# Altium PCB PCB_nano_3_2021-10-25.pcbdoc
Units mil, origin at the board's own origin, x right, y up, seen from the top; angles counter-clockwise.
Board outline 2271.13 x 2536.03 mil, 3 copper layers (Top Layer, Mid-Layer 1, Bottom Layer); 88 components, 110 nets, 418 pads, 132 vias.
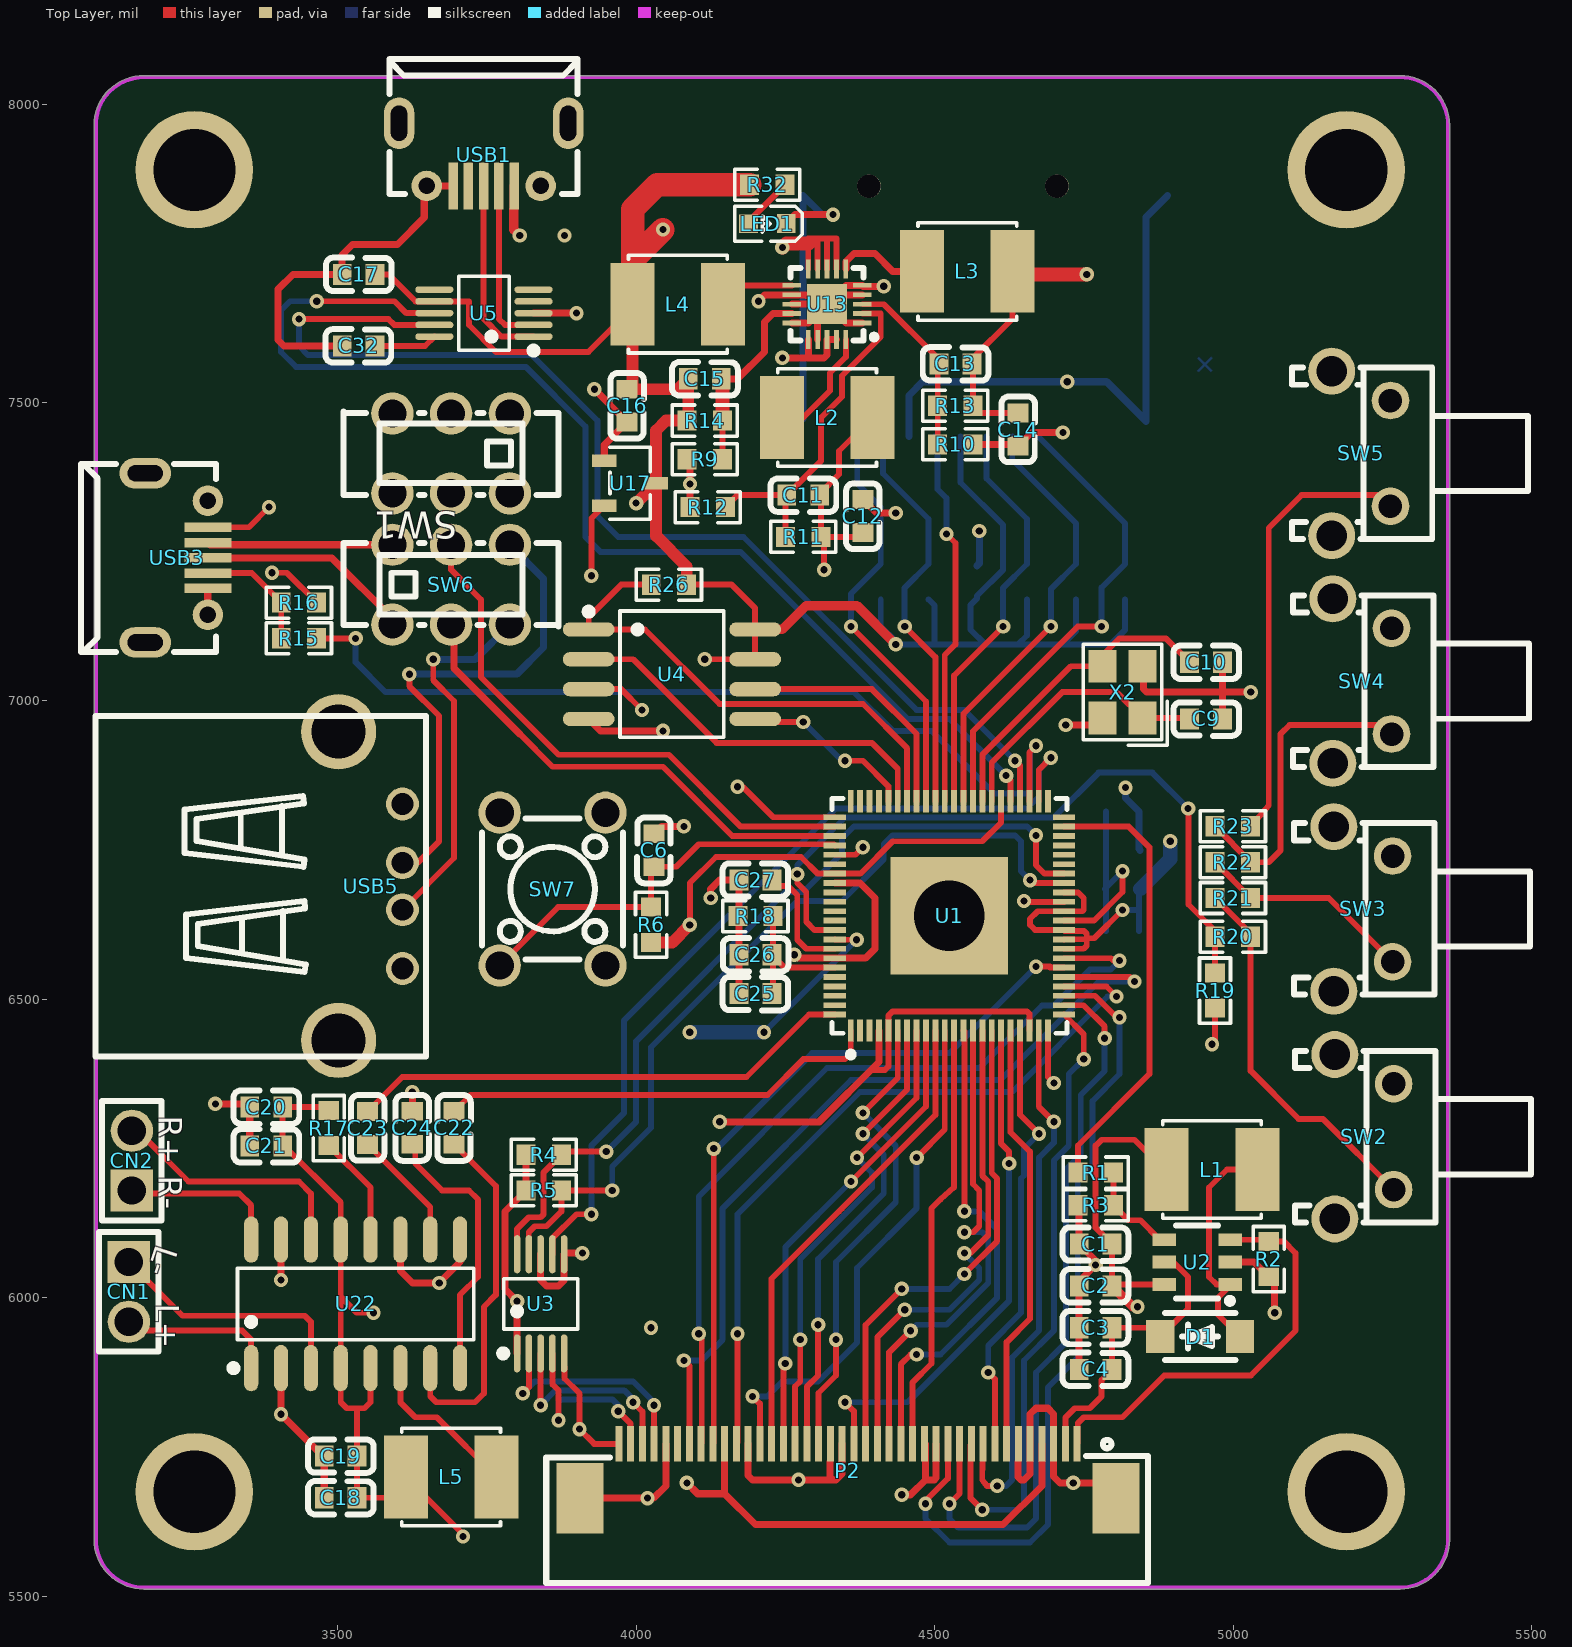
[diagram p0: Top Layer view]
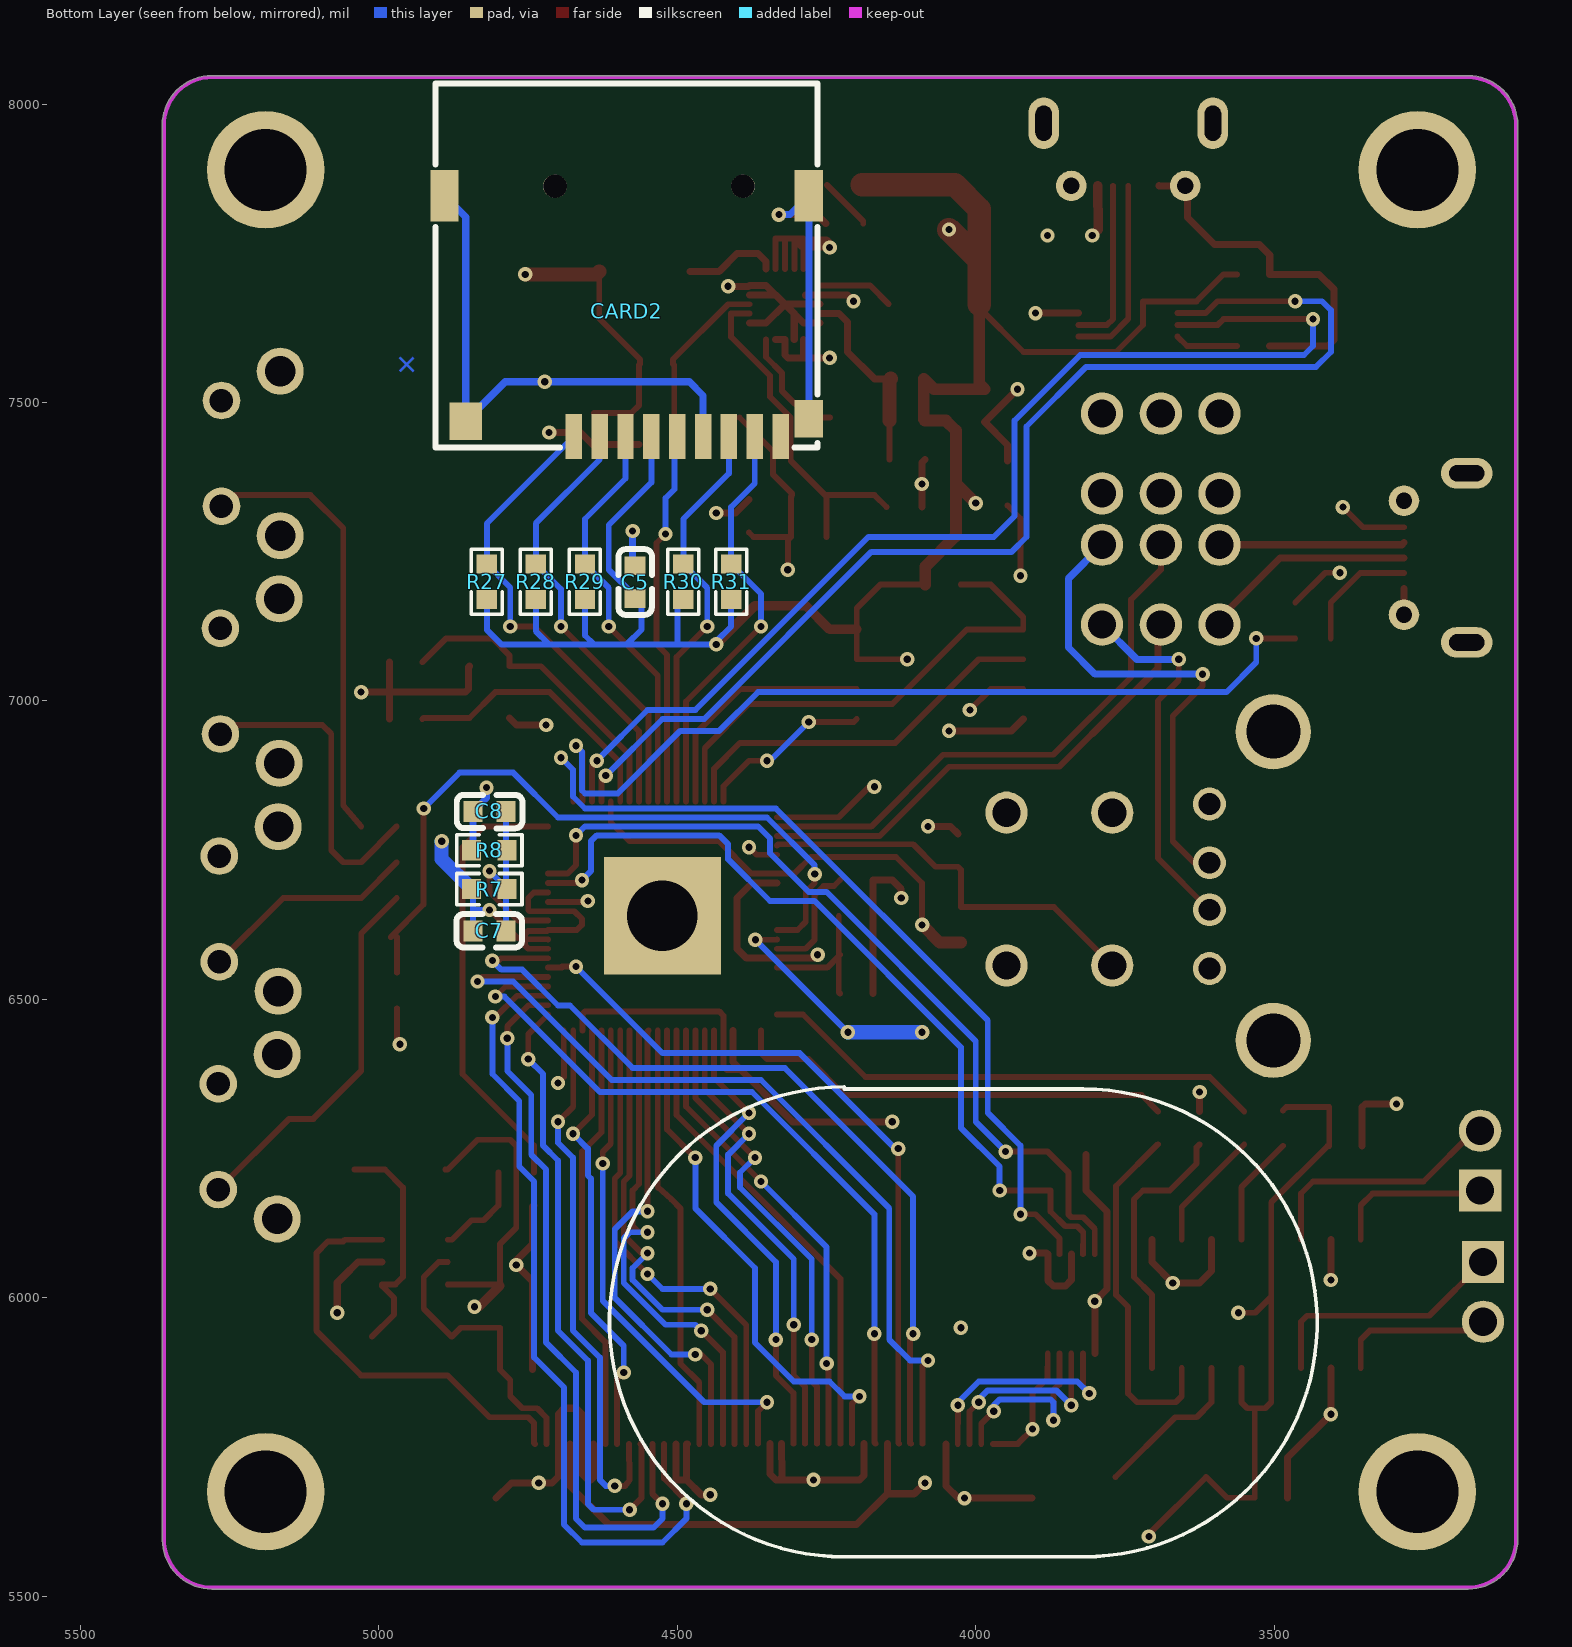
[diagram p1: Bottom Layer view, seen from below]
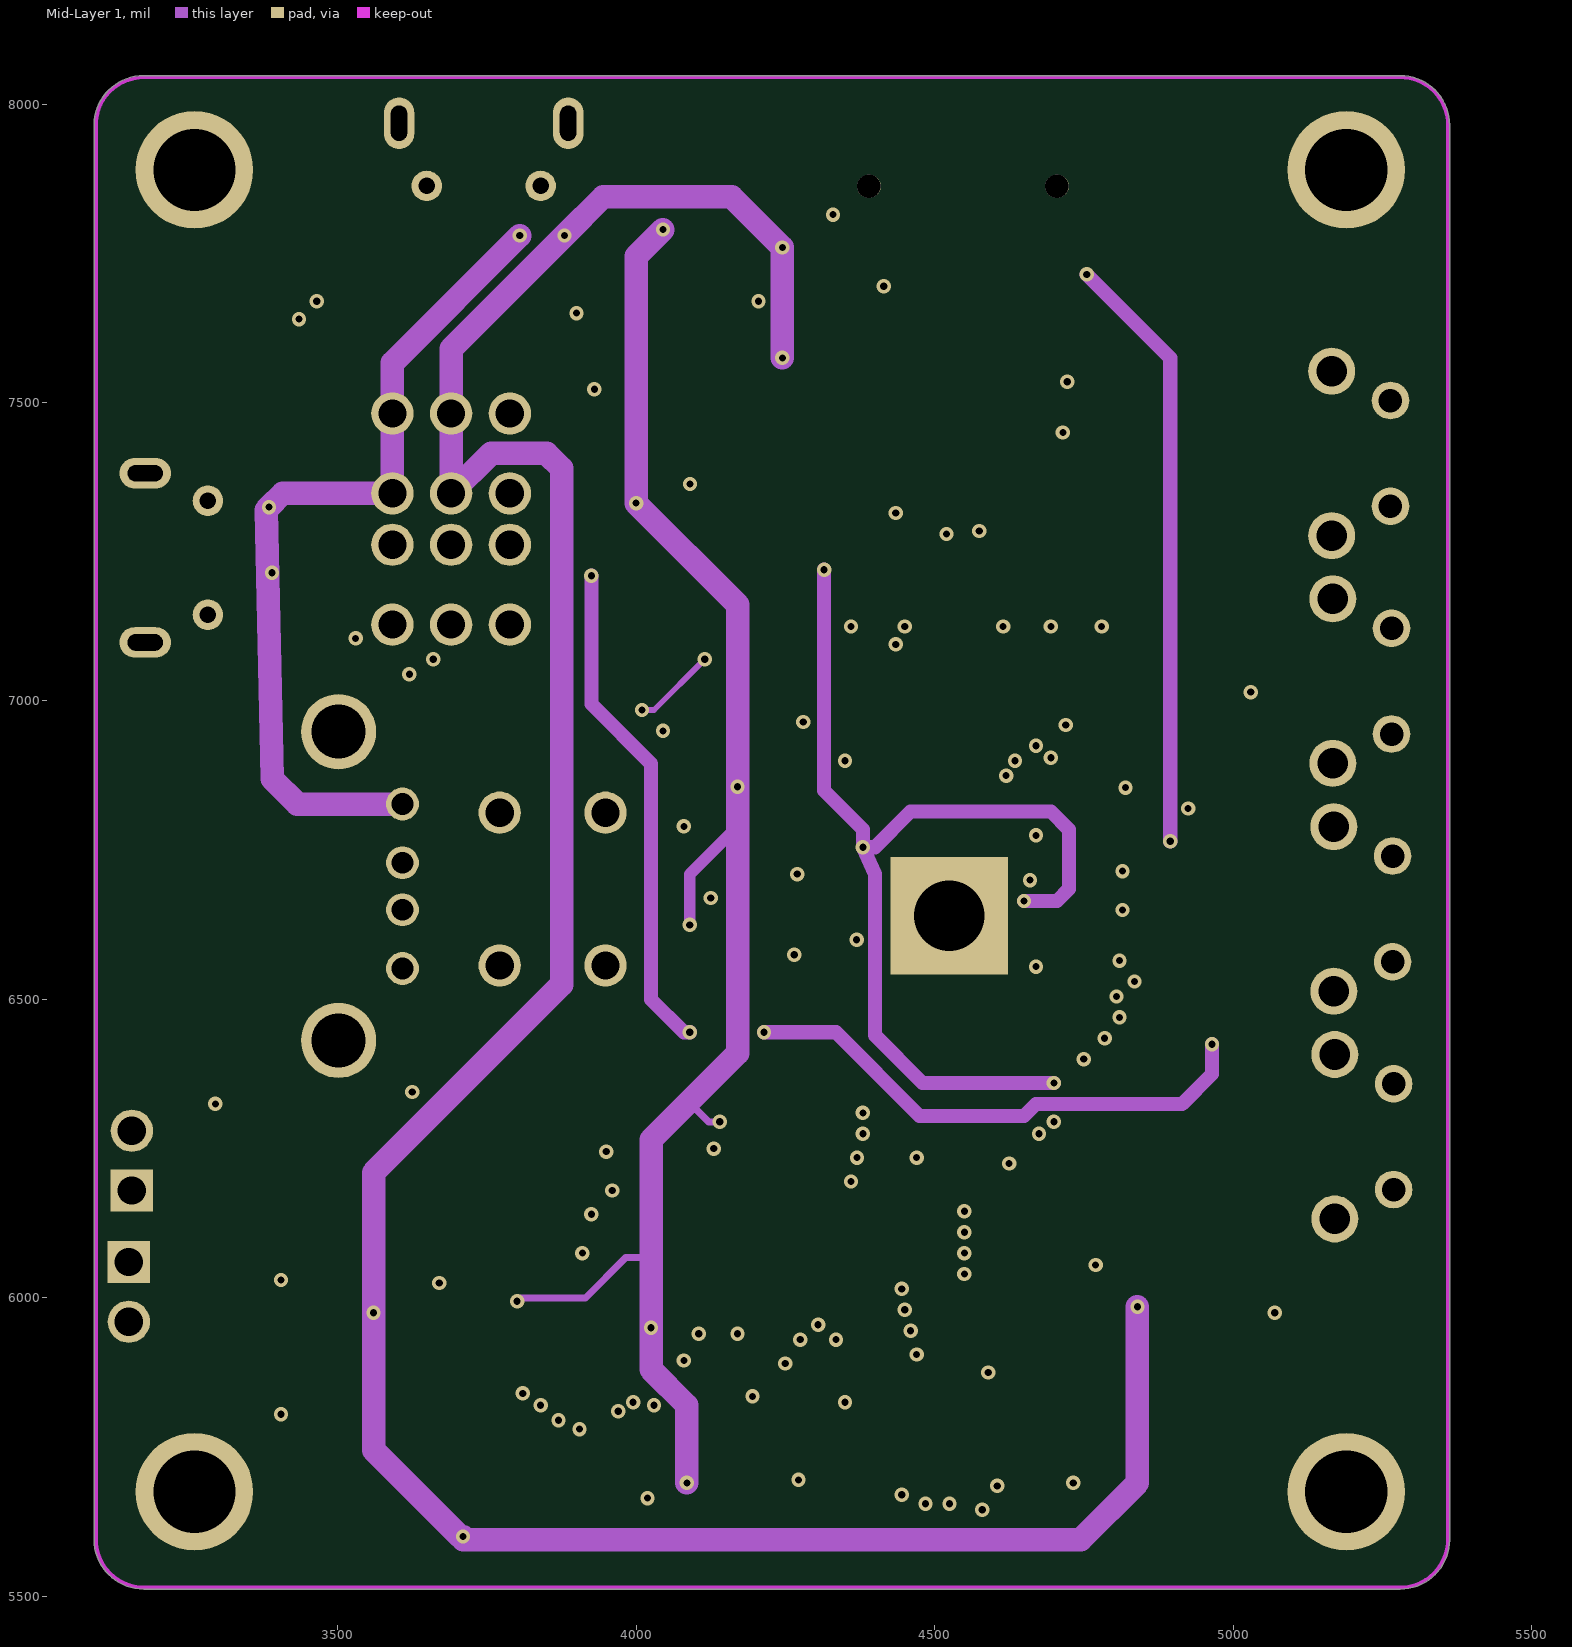
[diagram p2: Mid-Layer 1]

## Layer stack, top to bottom
Top Solder: solder mask 0.4, Solder Resist, Dk 3.5
Top Layer: signal copper 1.4
Dielectric1: dielectric 12.6, FR-4, Dk 4.8
Mid-Layer 1: signal copper 1.4
Dielectric2: dielectric 12.6, FR-4, Dk 4.8
Bottom Layer: signal copper 1.4
Bottom Solder: solder mask 0.4, Solder Resist, Dk 3.5

## Board outline
3174.62,5511.84 cw(c3174.84,5594.84) 3091.84,5594.62 cw(c3094.84,5594.84) 3091.83,5594.84 3091.83,7964.84 cw(c3094.84,7964.84) 3091.84,7965.07 cw(c3174.84,7964.84) 3174.62,8047.85 cw(c3174.84,8044.84) 3174.84,8047.86 5279.95,8047.86 cw(c5279.95,8044.84) 5280.17,8047.85 cw(c5279.95,7964.84) 5362.95,7964.84 cw(c5279.95,7964.84) 5362.95,7964.18 cw(c5359.94,7964.21) 5362.86,7963.46 5362.86,5594.84 cw(c5359.84,5594.84) 5362.85,5594.62 cw(c5279.84,5594.84) 5280.07,5511.84 cw(c5279.84,5514.84) 5279.84,5511.83 3174.84,5511.83 cw(c3174.84,5514.84)

## Design rules (kind name [scope] priority, off if disabled: settings)
Clearance [All] p1: gap=10
PolygonConnect [All] p1: connectstyle=Relief reliefconductorwidth=10 reliefentries=4 polygonreliefangle="90 Angle" airgapwidth=10
RoutingVias [All] p1: holewidth=28 width=50 viastyle="Through Hole" minholewidth=28 minwidth=50 maxholewidth=28 maxwidth=50
SolderMaskExpansion [All] p1: expansion=4
Width [All] p1: maxlimit=10 minlimit=10 preferedwidth=10
30 further rules are at their usual default settings.

## Components (designator, comment, footprint, x,y, rotation, side; value= is the part's Value field where it differs from the comment)
C1 "10uF" C0603#1 4769.84,6089.84 r0 top
C2 "1nF" C0603#1 4769.84,6019.84 r0 top
C3 "1uF" C0603#1 4769.84,5949.84 r0 top
C4 "10nF" C0603#1 4769.84,5879.84 r0 top
C5 "100nF" C0603#2 4570.72,7199.04 r90 bottom
C6 "1uF" C0603#1 4029.84,6749.84 r90 top
C7 "0.1uF" C0603#2 4814.84,6614.84 r0 bottom
C8 "0.1uF" C0603#2 4814.84,6814.84 r180 bottom
C9 "20pF" C0603#1 4954.84,6969.84 r180 top
C10 "20pF" C0603#1 4954.84,7064.84 r180 top
C11 "220pF" C0603#1 4279.84,7344.84 r180 top
C12 "10uF" C0603#1 4379.84,7309.84 r90 top
C13 "220pF" C0603#1 4534.84,7564.84 r180 top
C14 "10uF" C0603#1 4639.84,7454.84 r270 top
C15 "220pF" C0603#1 4114.84,7539.84 r180 top
C16 "10uF" C0603#1 3984.84,7494.84 r90 top
C17 "0.1uF" C0603#1 3534.84,7714.84 r180 top
C18 "10uF" C0603#1 3504.84,5664.84 r180 top
C19 "1uF" C0603#1 3504.84,5734.84 r180 top
C20 "10uF" C0603#1 3380.04,6319.43 r180 top
C21 "1uF" C0603#1 3380.04,6254.43 r180 top
C22 "470nF" C0603#1 3694.84,6284.84 r90 top
C23 "470nF" C0603#1 3550.04,6284.43 r270 top
C24 "10uF" C0603#1 3624.84,6284.84 r90 top
C25 "100nF" C0603#1 4199.84,6509.63 r0 top
C26 "10uF" C0603#1 4199.84,6574.84 r180 top
C27 "100nF" C0603#1 4199.84,6699.84 r0 top
C32 "0.1uF" C0603#1 3534.84,7594.84 r0 top
CARD2 "MR01A-01211" TF-SMD_MR01A-01211 4584.84,7644.84 r180 bottom
CN1 "RE-H022TD-1190 (LF)(SN)" HDR-TH_2P-P2.54-V-M-1 3149.84,6009.84 r270 top
CN2 "RE-H022TD-1190 (LF)(SN)" HDR-TH_2P-P2.54-V-M-1 3154.84,6229.84 r90 top
D1 "1N4007W" SOD-123_L2.8-W1.8-LS3.7-RD 4944.84,5934.84 r0 top
L1 "2.2uH" IND-SMD_L4.0-W4.0_SMNR4020 4964.84,6214.84 r180 top
L2 "2.2uH" IND-SMD_L4.0-W4.0_SMNR4020 4319.84,7474.84 r0 top
L3 "2.2uH" IND-SMD_L4.0-W4.0_SMNR4020 4554.84,7719.84 r0 top
L4 "2.2uH" IND-SMD_L4.0-W4.0_SMNR4020 4069.84,7664.84 r0 top
L5 "2.2uH" IND-SMD_L4.0-W4.0_SMNR4020 3689.84,5699.84 r180 top
LED1 "19-21/G6W-BL2N1L/3T" LED0603-RD_GREEN 4219.84,7799.8 r180 top
P2 "FPC 0.5MM 40P Pull type H2.0mm Pick up" CONN-SMD_AFC07-S40ECC-00 4354.84,5709.84 r180 top
R1 "0" R0603#1 4769.84,6209.84 r0 top
R2 "5.2R" R0603#1 5059.84,6064.84 r90 top
R3 "1k" R0603#1 4769.84,6154.84 r0 top
R4 "1k" R0603#1 3844.84,6239.84 r180 top
R5 "1k" R0603#1 3844.84,6179.84 r180 top
R6 "1k" R0603#1 4024.84,6624.84 r90 top
R7 "1k" R0603#2 4814.84,6684.84 r0 bottom
R8 "1k" R0603#2 4814.84,6749.84 r180 bottom
R9 "150K 1%" R0603#1 4114.84,7404.84 r0 top
R10 "150K 1%" R0603#1 4534.84,7429.84 r180 top
R11 "100K 1%" R0603#1 4279.84,7274.84 r0 top
R12 "100K 1%" R0603#1 4119.84,7324.84 r180 top
R13 "470K 1%" R0603#1 4534.84,7494.84 r180 top
R14 "680K 1%" R0603#1 4114.84,7469.84 r0 top
R15 "0" R0603#1 3434.84,7104.84 r180 top
R16 "47K" R0603#1 3434.84,7164.84 r0 top
R17 "10k" R0603#1 3485.04,6284.43 r90 top
R18 "10k" R0603#1 4199.84,6639.63 r180 top
R19 "100k" R0603#1 4969.84,6514.84 r90 top
R20 "6.8k" R0603#1 4999.84,6604.84 r0 top
R21 "8.2K" R0603#1 4999.84,6669.84 r0 top
R22 "10k" R0603#1 4999.84,6729.84 r0 top
R23 "11K" R0603#1 4999.84,6789.84 r0 top
R26 "2K" R0603#1 4054.84,7194.84 r180 top
R27 "47K" R0603#2 4819.2,7199.84 r270 bottom
R28 "47K" R0603#2 4737.02,7199.84 r270 bottom
R29 "47K" R0603#2 4654.84,7199.84 r270 bottom
R30 "47K" R0603#2 4489.84,7199.84 r270 bottom
R31 "47K" R0603#2 4409.84,7199.84 r270 bottom
R32 "5K" R0603#1 4219.84,7864.84 r180 top
SW1 "K3-2235D-F1" SW-TH_K3-2235D-F1 3689.84,7414.84 r180 top
SW2 "K2-1102AQ-H4CW-01" SW-TH_K2-1102BQ-G4CW-01 5219.84,6269.84 r90 top
SW3 "K2-1102AQ-H4CW-01" SW-TH_K2-1102BQ-G4CW-01 5218.1,6651.51 r90 top
SW4 "K2-1102AQ-H4CW-01" SW-TH_K2-1102BQ-G4CW-01 5216.36,7033.18 r90 top
SW5 "K2-1102AQ-H4CW-01" SW-TH_K2-1102BQ-G4CW-01 5214.62,7414.84 r90 top
SW6 "K3-2235D-F1" SW-TH_K3-2235D-F1 3689.84,7194.84 r0 top
SW7 "TS665CJ" SW-TH_4P-L6.0-W6.0-P4.50-LS6.5 3859.84,6684.84 r90 top
U1 "F1C100S" QFN-88_10.0X10.0XP04MM 4524.84,6639.84 r90 top
U2 "SY7201ABC" SOT-23-6_L2.9-W1.6-P0.95-LS2.8-BR 4939.84,6059.84 r0 top
U3 "NS2009" MSOP-10_L3.0-W3.0-P0.50-LS5.0-BL 3839.84,5989.84 r0 top
U4 "XT25F128BSSIGT" SOP-8_L5.3-W5.3-P1.27-LS8.0-BL 4059.84,7044.84 r270 top
U5 "CH340E" MSOP-10_L3.0-W3.0-P0.50-LS5.0-BL 3744.84,7649.84 r90 top
U13 "EA3036C" WQFN-20_L3.0-W3.0-P0.40-BL-EP 4319.84,7664.84 r90 top
U17 "XC6206P302MR_C347375" SOT-23-3_L3.0-W1.7-P0.95-LS2.9-BR 3989.84,7364.84 r180 top
U22 "PAM8403DR" SOIC-16_L9.9-W3.9-P1.27-LS6.0-BL 3529.84,5989.84 r0 top
USB1 "MICROXNJ" MICRO-USB-SMD_MICROXNJ 3744.33,7915.52 r180 top
USB3 "MICROXNJ" MICRO-USB-SMD_MICROXNJ 3229.84,7239.84 r270 top
USB5 "KH-AF90DIP-112" USB-A-TH_USB-A-F-90 3554.84,6689.84 r270 top
X2 "24MHz" CRYSTAL-SMD_4P-L3.2-W2.5-BL 4814.84,7014.84 r90 top

## Footprints (in the part's own frame and the unit in brackets; to place one, negate y for a bottom-side part, rotate by r counter-clockwise, add the part's x,y. Pads: shape width x height; smd on the part's side, far side on the other; paste and mask are expansions set on the pad)
C0603#1 [mm]
  rect 0.8x0.9 smd: 1(-0.7,0) 2(0.7,0)
  silkscreen extent -1.41,-0.71 1.39,0.72
C0603#2 [mm]
  rect 0.8x0.9 smd: 1(0.7,0) 2(-0.7,0)
  silkscreen extent -1.39,-0.72 1.41,0.71
CONN-SMD_AFC07-S40ECC-00 [mm]
  rect 0.3x1.5 smd: 1(-9.75,-1.153) 2(-9.25,-1.153) 3(-8.75,-1.153) 4(-8.25,-1.153) 5(-7.75,-1.153) 6(-7.25,-1.153) 7(-6.75,-1.153) 8(-6.25,-1.153) 9(-5.75,-1.153) 10(-5.25,-1.153) 11(-4.75,-1.153) 12(-4.25,-1.153) 13(-3.75,-1.153) 14(-3.25,-1.153) 15(-2.754,-1.155) 16(-2.251,-1.154) 17(-1.751,-1.153) 18(-1.251,-1.153) 19(-0.751,-1.153) 20(-0.249,-1.156) 21(0.251,-1.156) 22(0.751,-1.156) 23(1.251,-1.156) 24(1.751,-1.156) 25(2.251,-1.156) 26(2.752,-1.157) 27(3.252,-1.157) 28(3.751,-1.156) 29(4.251,-1.157) 30(4.752,-1.157) 31(5.252,-1.156) 32(5.751,-1.156) 33(6.252,-1.156) 34(6.751,-1.156) 35(7.251,-1.156) 36(7.75,-1.153) 37(8.25,-1.153) 38(8.75,-1.153) 39(9.25,-1.153) 40(9.75,-1.153)
  rect 2x3 smd: 41(11.4,1.157) 42(-11.4,1.158)
  silkscreen extent -12.77,-1.32 12.85,4.78
CRYSTAL-SMD_4P-L3.2-W2.5-BL [mm]
  rect 1.4x1.2 smd: 1(-1.1,-0.85) 2(1.1,-0.85) 3(1.1,0.85) 4(-1.1,0.85)
  silkscreen extent -2.26,-1.91 2.03,1.68
HDR-TH_2P-P2.54-V-M-1 [mm]
  rect 1.8x1.8 hole 1.2: 1(-1.27,0)
  round 1.8 hole 1.2: 2(1.27,0)
  silkscreen extent -2.54,-1.27 2.54,1.27
IND-SMD_L4.0-W4.0_SMNR4020 [mm]
  rect 1.874x3.52 smd: 1(1.928,0) 2(-1.928,0)
  silkscreen extent -2.1,-2.08 2.1,2.08
LED0603-RD_GREEN [mm]
  rect 0.8x0.8 smd: 1(-0.799,-0.003) 2(0.799,0.004)
  silkscreen extent -1.49,-0.75 1.39,0.76
MICRO-USB-SMD_MICROXNJ [mm]
  rect 0.4x2 smd: 1(-1.3,1.327) 2(-0.65,1.327) 3(0,1.327) 4(0.65,1.327) 5(1.3,1.327)
  round 1.3 hole 0.7: 6(2.425,1.335) 9(-2.425,1.335)
  oval 1.3x2.2 hole 0.7 slot 1.5 at 90 deg: 7(3.6,-1.335) 8(-3.6,-1.335)
  silkscreen extent -4,-4.07 4,1.68
MSOP-10_L3.0-W3.0-P0.50-LS5.0-BL [mm]
  oval 0.28x1.62 smd: 1(-1,-2.11) 2(-0.5,-2.11) 3(0,-2.11) 4(0.5,-2.11) 5(1,-2.11) 6(1,2.11) 7(0.5,2.11) 8(0,2.11) 9(-0.5,2.11) 10(-1,2.11)
  silkscreen extent -1.74,-2.26 1.58,1.07
QFN-88_10.0X10.0XP04MM [mm]
  rect 0.95x0.25 smd: 1(-4.875,4.2) 2(-4.875,3.8) 3(-4.875,3.4) 4(-4.875,3) 5(-4.875,2.6) 6(-4.875,2.2) 7(-4.875,1.8) 8(-4.875,1.4) 9(-4.875,1) 10(-4.875,0.6) 11(-4.875,0.2) 12(-4.875,-0.201) 13(-4.875,-0.601) 14(-4.875,-0.999) 15(-4.875,-1.401) 16(-4.875,-1.799) 17(-4.875,-2.201) 18(-4.875,-2.6) 19(-4.875,-3.001) 20(-4.875,-3.4) 21(-4.875,-3.8) 22(-4.875,-4.2) 45(4.876,-4.2) 46(4.876,-3.8) 47(4.876,-3.4) 48(4.876,-3.001) 49(4.876,-2.6) 50(4.876,-2.201) 51(4.876,-1.799) 52(4.876,-1.401) 53(4.876,-0.999) 54(4.876,-0.601) 55(4.876,-0.201) 56(4.876,0.2) 57(4.876,0.6) 58(4.876,1) 59(4.876,1.4) 60(4.876,1.8) 61(4.876,2.2) 62(4.876,2.6) 63(4.876,3) 64(4.876,3.4) 65(4.876,3.8) 66(4.876,4.2)
  rect 0.25x0.95 smd: 23(-4.199,-4.875) 24(-3.801,-4.875) 25(-3.399,-4.875) 26(-3.001,-4.875) 27(-2.599,-4.875) 28(-2.2,-4.875) 29(-1.8,-4.875) 30(-1.4,-4.875) 31(-1,-4.875) 32(-0.6,-4.875) 33(-0.2,-4.875) 34(0.2,-4.875) 35(0.6,-4.875) 36(1,-4.875) 37(1.4,-4.875) 38(1.8,-4.875) 39(2.2,-4.875) 40(2.6,-4.875) 41(3,-4.875) 42(3.4,-4.875) 43(3.8,-4.875) 44(4.2,-4.875) 67(4.2,4.876) 68(3.8,4.876) 69(3.4,4.876) 70(3,4.876) 71(2.6,4.876) 72(2.2,4.876) 73(1.8,4.876) 74(1.4,4.876) 75(1,4.876) 76(0.6,4.876) 77(0.2,4.876) 78(-0.2,4.876) 79(-0.6,4.876) 80(-1,4.876) 81(-1.4,4.876) 82(-1.8,4.876) 83(-2.2,4.876) 84(-2.599,4.876) 85(-3.001,4.876) 86(-3.399,4.876) 87(-3.801,4.876) 88(-4.199,4.876)
  rect 5x5 hole 3: 89(0.001,0)
  silkscreen extent -6.02,-5 5,5
R0603#1 [mil]
  rect 31.75x34.02 smd: 1(-29.65,0) 2(29.66,0)
  silkscreen extent -55,-26 55,26
R0603#2 [mil]
  rect 31.75x34.02 smd: 1(29.66,0) 2(-29.65,0)
  silkscreen extent -55,-26 55,26
SOD-123_L2.8-W1.8-LS3.7-RD [mm]
  rect 1.2x1.4 smd: 1(-1.7,0) 2(1.7,0)
  silkscreen extent -1.5,-1 1.5,1
SOIC-16_L9.9-W3.9-P1.27-LS6.0-BL [mil]
  oval 23.7x77.6 smd: 1(-175,-107.7) 2(-125,-107.7) 3(-75,-107.7) 4(-25,-107.7) 5(25,-107.7) 6(75,-107.7) 7(125,-107.7) 8(175,-107.7) 9(175,107.7) 10(125,107.7) 11(75,107.7) 12(25,107.7) 13(-25,107.7) 14(-75,107.7) 15(-125,107.7) 16(-175,107.7)
  silkscreen extent -211,-114 198,60
SOP-8_L5.3-W5.3-P1.27-LS8.0-BL [mil]
  oval 23.98x86.79 smd: 1(-75,-139.46) 2(-25,-139.46) 3(25,-139.46) 4(75,-139.46) 5(75,139.46) 6(25,139.46) 7(-25,139.46) 8(-75,139.46)
  silkscreen extent -111,-145 106,87
SOT-23-3_L3.0-W1.7-P0.95-LS2.9-BR [mm]
  rect 1.037x0.532 smd: 1(1.101,-0.95) 2(1.101,0.95) 3(-1.101,0)
  silkscreen extent -0.86,-1.53 0.86,1.53
SOT-23-6_L2.9-W1.6-P0.95-LS2.8-BR [mm]
  rect 1x0.55 smd: 1(1.4,-0.95) 2(1.4,0) 3(1.4,0.95) 4(-1.4,0.95) 5(-1.4,0) 6(-1.4,-0.95)
  silkscreen extent -0.9,-1.78 1.52,1.55
SW-TH_4P-L6.0-W6.0-P4.50-LS6.5 [mm]
  round 1.8 hole 1.2: 1(-3.25,2.25) 2(3.25,2.25) 3(-3.25,-2.25) 4(3.25,-2.25)
  silkscreen extent -3,-3 3,3
SW-TH_K2-1102BQ-G4CW-01 [mm]
  round 1.6 hole 1: 1(-2.25,-1.25) 2(2.25,-1.25)
  round 2 hole 1.3: 3(3.5,1.25) 4(-3.5,1.25)
  silkscreen extent -3.65,-7.1 3.65,2.94
SW-TH_K3-2235D-F1 [mm]
  round 1.8 hole 1.2: 1(-2.5,1.7) 2(0,1.7) 3(2.5,1.7) 4(-2.5,-1.7) 5(0,-1.7) 6(2.5,-1.7)
  silkscreen extent -4.57,-1.78 4.57,1.78
TF-SMD_MR01A-01211 [mm]
  rect 0.7x1.9 smd: 1(-2.25,-5.125) 2(-1.15,-5.125) 3(-0.05,-5.125) 4(1.05,-5.125) 5(2.15,-5.125) 6(3.25,-5.125) 7(4.35,-5.125) 8(5.45,-5.125) 9(6.55,-5.125)
  rect 1.2x1.6 smd: 10(7.75,-4.375)
  rect 1.2x2.2 smd: 11(7.75,5.125) 12(-7.75,5.125)
  rect 1.4x1.6 smd: 13(-6.85,-4.475)
  round 1 hole 1 unplated: ""(-3.05,5.527) ""(4.95,5.525)
  silkscreen extent -8.13,-5.59 8.13,9.91
USB-A-TH_USB-A-F-90 [mm]
  round 3.2 hole 2.3: 0(-6.571,-1.359) 0(6.571,-1.359)
  round 1.4 hole 0.92: 1(-3.492,1.359) 2(-0.993,1.359) 3(1.008,1.359) 4(3.508,1.359)
  silkscreen extent -7.25,-11.7 7.26,2.37
WQFN-20_L3.0-W3.0-P0.40-BL-EP [mm]
  rect 0.2x0.8 smd: 1(-0.8,-1.5) 2(-0.4,-1.5) 3(0,-1.5) 4(0.4,-1.5) 5(0.8,-1.5) 11(0.8,1.5) 12(0.4,1.5) 13(0,1.5) 14(-0.4,1.5) 15(-0.8,1.5)
  rect 0.8x0.2 smd: 6(1.5,-0.8) 7(1.5,-0.4) 8(1.5,0) 9(1.5,0.4) 10(1.5,0.8) 16(-1.5,0.8) 17(-1.5,0.4) 18(-1.5,0) 19(-1.5,-0.4) 20(-1.5,-0.8)
  rect 1.7x1.7 smd: 21(0,0)
  silkscreen extent -1.55,-2.1 1.55,1.55

## Free pads (board coordinates)
  round 196.85 hole 137.8: ""(3259.84,5674.84) ""(3259.84,7889.84) ""(5189.84,5674.84) ""(5189.84,7889.84)

## Via types
v1: diameter 24, hole 12, Top Layer to Bottom Layer, 131 vias
v2: diameter 25.98, hole 12.99, Top Layer to Bottom Layer, 1 vias

## Nets (pads, with @x,y where several pads share a name; then routed paths per layer and width w, separated by ;. In a path a pad name is that pad's centre, name@x,y a point inside that pad or via, vN(x,y) a via of type N, cw(c..) or ccw(c..) an arc to the next point about the centre after c; other vN are vias at no path point)
1V2: C11.1 C12.1 L2.1 R11.2 U1.22 U1.35 U1.71 | length 2289.9
  Top Layer w9.84: v1(4314.84,7219.84) 4314.84,7269.5 R11.2 ; U1.71 4367.21,6742.21 4369.84,6744.84 v1(4379.84,6754.84) ; C12.1 4372.4,7274.84 R11.2 ; L2.1@4395.75,7474.84 4339.84,7418.93 4339.84,7379.84 4307.4,7347.4 C11.1 4309.5,7342.74 R11.2 ; v1(4649.84,6664.84) 4651.24,6663.44 U1.35@4716.74,6663.44 ; U1.22 4689.84,6369.84 v1(4699.84,6359.84)
  Mid-Layer 1 w23.62: v1(4314.84,7219.84) 4314.84,6849.84 4379.84,6784.84 v1(4379.84,6754.84) ; v1(4649.84,6664.84) 4704.84,6664.84 4724.84,6684.84 4724.84,6784.84 4694.84,6814.84 4459.84,6814.84 4399.84,6754.84 v1(4379.84,6754.84) ; v1(4699.84,6359.84) 4479.84,6359.84 4399.84,6439.84 4399.84,6709.84 v1(4379.84,6754.84)
2V5: C7.1 C13.1 C14.1 L3.1 R7.1 R13.1 U1.30 U1.31 U1.32 U1.34 U1.36 | length 2111.4
  Top Layer w9.84: C13.1 4564.5,7562.74 R13.1 4576.94,7482.4 C14.1 ; C13.1 4562.44,7572.44 4630.74,7640.74 L3.1 ; U1.30@4716.74,6584.74 4749.74,6584.74 4754.84,6589.84 4754.84,6609.84 4749.84,6614.84 4718.14,6614.84 U1.32@4716.74,6616.24 ; U1.31@4716.74,6600.44 4754.84,6601.04 ; U1.32 4668.47,6616.21 4659.84,6624.84 4659.84,6634.84 4672.71,6647.71 U1.34 4747.71,6647.71 4749.84,6649.84 4749.84,6669.84 4740.47,6679.21 U1.36 ; 4754.84,6602.4 4767.4,6602.4 v1(4814.84,6649.84)
  Top Layer w23.62: L3.1@4630.75,7719.84 4635.75,7714.84 v1(4754.84,7714.84)
  Mid-Layer 1 w23.62: v1(4754.84,7714.84) 4894.84,7574.84 v1(4894.84,6764.84)
  Bottom Layer w9.84: v1(4814.84,6649.84) 4840.11,6649.84 4842.4,6652.13 ; C7.1 4842.4,6682.74 R7.1
  Bottom Layer w23.62: R7.1 4894.84,6735.18 v1(4894.84,6764.84)
3V0: R19.1 U1.80 U17.2 | length 2301.3
  Top Layer w9.84: v1(3924.84,7209.84) 3924.84,7305.8 U17.2 ; U1.80@4332.94,6600.44 v1@4374.84,6599.84 ; v1(4964.84,6424.84) 4969.84,6429.84 R19.1
  Mid-Layer 1 w23.62: v1(3924.84,7209.84) 3924.84,6994.84 4024.84,6894.84 4024.84,6499.84 4079.84,6444.84 v1(4089.84,6444.84) ; v1(4214.19,6444.84) 4334.84,6444.84 4474.84,6304.84 4649.84,6304.84 4669.84,6324.84 4914.84,6324.84 4964.84,6374.84 v1(4964.84,6424.84)
  Bottom Layer w9.84: v1(4214.19,6444.84) v1(4369.27,6599.92)
  Bottom Layer w23.62: v1(4089.84,6444.84) v1(4214.19,6444.84)
+5V: C1.2 C2.2 C18.1 C19.1 C20.1 C21.1 L1.1 L5.1 R17.2 SW1.2 SW1.5 U2.6 U13.7 U13.8 U13.9 U13.10 U13.16 U13.18 U13.19 U22.4 U22.5 U22.13 | length 7152.3
  Top Layer w9.84: R17.2 3479.69,6319.43 C20.1 C21.1 3410.25,6254.43 3504.84,6159.84 U22.13 U22.4 3504.84,5824.84 3514.84,5814.84 3544.84,5814.84 3554.84,5824.84 U22.5 ; 3504.84,6001.65 3531.65,5974.84 v1(3559.84,5974.84) ; 3531.35,5814.84 3532.4,5813.79 C19.1 C18.1 3578.93,5664.84 L5.1 3709.84,5603.93 v1(3709.84,5599.84) ; U13.10@4288.34,7723.94 4288.34,7774.84 4335.64,7774.84 U13.7 ; U13.9@4303.54,7723.94 4303.54,7774.84 ; U13.8@4319.64,7723.94 4319.64,7774.84 ; U2.6 4800,6022.44 C2.2 C1.2 4769.84,6117.4 4769.84,6254.84 4779.84,6264.84 4834.84,6264.84 4884.84,6214.84 L1.1
  Top Layer w11.81: v1(4244.84,7574.84) 4283.34,7574.84 4314.84,7574.84 4319.83,7579.83 U13.18 U13.19 ; 4288.34,7574.84 U13.16
  Top Layer w15.75: C2.2 4832.4,5984.84 v1(4839.84,5984.84)
  Top Layer w23.62: v1(4244.84,7759.84) 4251.52,7766.52 4288.34,7766.52
  Mid-Layer 1 w39.37: 3559.84,6159.84 v1(3559.84,5974.84) ; v1(4244.84,7574.84) v1(4244.84,7759.84) 4159.84,7844.84 3944.84,7844.84 v1(3879.84,7779.84) 3689.84,7589.84 SW1.2 3756.77,7414.84 3849.84,7414.84 3874.84,7389.84 3874.84,6524.84 3559.84,6209.84 v1(3559.84,5974.84) ; v1(4839.84,5984.84) 4839.84,5689.84 4744.84,5594.84 3709.84,5594.84 v1(3709.84,5599.84) 3704.84,5599.84 3559.84,5744.84 v1(3559.84,5974.84)
E11_I2C_SCL: R4.1 U1.38 U3.10 | length 1430.2
  Top Layer w9.84: U3.10 3800.47,6115.47 3819.84,6134.84 3839.84,6134.84 3844.84,6139.84 3844.84,6210.18 R4.1 3879.5,6244.84 v1@3944.84,6244.84 ; v1(4669.84,6774.84) 4669.84,6724.84 4683.97,6710.71 U1.38
  Bottom Layer w9.84: v1(3949.84,6244.84) 3999.84,6294.84 3999.84,6429.84 4249.84,6679.84 4279.84,6679.84 4344.84,6744.84 4344.84,6769.84 4364.84,6789.84 4399.84,6789.84 4654.84,6789.84 v1(4669.84,6774.84)
E12_I2C_SDA: R5.1 U1.37 U3.9 | length 1409.6
  Top Layer w9.84: U3.9@3820.14,6072.94 3819.84,6109.84 3829.84,6119.84 3849.84,6119.84 3874.54,6144.54 R5.1 ; R5.1 3939.84,6179.84 v1(3959.84,6179.84) ; v1(4659.84,6699.84) 4664.72,6694.96 U1.37
  Bottom Layer w9.84: v1(3959.84,6179.84) 3959.84,6219.84 4024.84,6284.84 4024.84,6369.84 4024.84,6419.84 4269.84,6664.84 4344.84,6664.84 4414.84,6734.84 4414.84,6759.84 4429.84,6774.84 4634.84,6774.84 4644.84,6764.84 4644.84,6714.84 v1(4659.84,6699.84)
GND: C1.1 C2.1 C3.1 C4.1 C5.1 C6.2 C8.2 C9.1 C10.1 C12.2 C14.2 C16.1 C17.2 C18.2 C19.2 C20.2 C21.2 C24.2 C25.1 C26.2 C27.1 C32.1 CARD2.6 CARD2.10 CARD2.11 CARD2.12 CARD2.13 LED1.1 P2.3 P2.5 P2.6 P2.13 P2.14 P2.21 P2.22 P2.29 P2.36 P2.41 P2.42 R2.1 R3.1 R8.2 R9.1 R10.1 R12.2 R18.2 SW2.2 SW3.2 SW4.2 SW5.2 SW7.3 U1.74 U1.82 U1.89 U2.2 U3.6 U3.8 U4.4 U5.3 U13.1 U13.4 U13.5 U13.12 U13.13 U13.15 U13.17 U13.21 U17.1 U22.2 U22.9 U22.11 U22.15 USB1.5 USB1.6 USB1.7 USB1.8 USB1.9 USB3.5 USB3.6 USB3.7 USB3.8 USB3.9 USB5.4 X2.2 X2.4 | length 6940.4
  Top Layer w11.81: USB3.5 USB3.6 ; v1(3294.84,6324.84) 3347.07,6324.84 C20.2 C21.2 ; U22.2 v1(3404.84,5804.84) 3477.28,5732.4 C18.2 ; v1(3404.84,6029.84) U22.15 ; C32.1 3409.84,7594.84 3399.84,7604.84 3399.84,7689.84 3424.84,7714.84 C17.2 3507.28,7747.28 3524.84,7764.84 3599.84,7764.84 3644.84,7809.84 3644.84,7858.94 USB1.6 USB1.5 ; U22.11 3604.84,6044.84 3624.84,6024.84 v1(3669.84,6024.84) 3704.84,6059.84 U22.9 ; C24.2 v1(3624.84,6344.84) ; U5.3 v1(3899.84,7649.84) ; U3.8 3839.84,6029.84 3849.84,6019.84 3869.84,6019.84 3879.21,6029.21 U3.6 3881.14,6074.84 v1(3909.84,6074.84) ; P2.41 v1(4018.94,5664.28) 4029.28,5664.28 4049.71,5684.71 P2.36 ; U4.4 3940.38,6949.84 v1(4044.84,6949.84) ; v1@3929.84,7524.84 v1(3929.84,7522.28) C16.1 3946.48,7428.92 U17.1 ; C6.2 4042.28,6789.84 v1(4079.84,6789.84) ; R9.1 4090.18,7399.84 v1(4090.18,7363.53) R12.2 ; v1(4124.84,6669.84) 4124.84,6684.84 4139.84,6699.84 C27.1 C25.1 ; P2.29 4187.48,5702.2 4194.84,5694.84 v1(4271.8,5694.84) 4329.84,5694.84 ; v1@4204.84,7664.84 v1(4204.84,7669.84) 4214.84,7679.84 U13.12 4284.84,7679.84 ; LED1.1 4266.22,7814.84 v1(4329.84,7814.84) ; U13.15 4288.35,7633.34 U13.21 ; U13.13 U13.21 ; v1(4264.84,6574.84) 4270.72,6568.96 U1.82 4383.96,6568.96 4399.84,6584.84 4399.84,6669.84 4374.72,6694.96 U1.74 ; U13.17 4304.09,7649.08 U13.21 ; P2.22 4324.84,5699.84 4329.84,5694.84 ; P2.21 4344.94,5704.94 4334.84,5694.84 4329.84,5694.84 ; U13.1 4351.33,7633.34 U13.21 ; U13.4 4335.59,7680.58 U13.21 ; C12.2 4402.4,7314.84 v1(4434.84,7314.84) ; v1(4414.84,7694.84) 4380.39,7694.84 U13.5 4351.34,7696.33 U13.21 ; v1(4444.84,5669.84) 4459.84,5669.84 4484.84,5694.84 ; P2.14 4484.84,5755.24 4484.84,5694.84 ; P2.13 4502.49,5697.86 4499.47,5694.84 4484.84,5694.84 ; R10.1 4637.28,7429.84 C14.2 4662.4,7449.84 v1(4714.84,7449.84) ; P2.6 4639.84,5699.84 4644.84,5694.84 4649.84,5694.84 4659.98,5704.98 P2.5 4659.98,5804.98 4669.84,5814.84 4689.84,5814.84 4699.35,5805.33 4699.35,5755.24 4699.35,5700.33 4709.84,5689.84 v1(4732.17,5689.84) 4778.09,5689.84 P2.42 ; v1(4719.84,6959.84) 4769.68,6959.84 X2.4 ; R3.1 4742.28,6152.74 C1.1 4769.84,6062.28 v1(4769.84,6054.84) 4742.28,6027.28 C2.1 C4.1 ; X2.2@4848.3,7058.15 4849.84,7056.61 4849.84,7019.84 4854.84,7014.84 v1(5029.84,7014.84) ; C9.1 C10.1 ; U2.2 5035.18,6059.84 R2.1 5069.84,6025.18 v1(5069.84,5974.84)
  Bottom Layer w11.81: CARD2.10 CARD2.11 4311.49,7814.84 v1(4329.84,7814.84) ; CARD2.6 4456.89,7511.89 4479.84,7534.84 4722.25,7534.84 4788.34,7534.84 CARD2.13 4854.53,7811.18 CARD2.12 ; C5.1 4574.84,7230.72 v1(4574.84,7284.84) ; v1(4819.84,6854.84) 4819.84,6837.4 C8.2 4842.4,6751.94 R8.2
  other v1: 4722.25,7534.84
  other v2: 4524.88,6639.81
HOSCI: C9.2 U1.51 X2.1 | length 464.1
  Top Layer w9.84: U1.51 4595.69,6896.74 4713.79,7014.84 4805,7014.84 X2.1 4925.59,6971.53 C9.2
HOSCO: C10.2 U1.52 X2.3 | length 533.3
  Top Layer w9.84: U1.52 4580.04,6909.94 4728.25,7058.15 X2.3@4781.37,7058.15 ; X2.3@4781.38,7058.15 4781.38,7076.38 4809.84,7104.84 4887.29,7104.84 C10.2
HPL: C22.2 U1.1 | length 743.3
  Top Layer w9.84: C22.2 3722.28,6339.84 4219.84,6339.84 4279.84,6399.84 4349.84,6399.84 4359.49,6409.49 U1.1
HPR: C23.1 U1.88 | length 850.3
  Top Layer w9.84: C23.1@3550.04,6311.94 3607.94,6369.84 4184.84,6369.84 4289.54,6474.54 U1.88
KEY: R19.2 R20.1 U1.79 | length 1198
  Top Layer w9.84: v1(4269.84,6709.84) 4269.84,6694.84 4284.84,6679.84 4284.84,6629.84 4298.47,6616.21 U1.79 ; v1(4924.84,6819.84) 4925.54,6819.14 4925.54,6658.84 R20.1@4980.14,6604.14 ; R19.2 4969.84,6604.5 R20.1
  Bottom Layer w9.84: v1(4269.84,6709.84) 4269.84,6724.84 4349.84,6804.84 4699.84,6804.84 4774.84,6879.84 4864.84,6879.84 v1(4924.84,6819.84)
LCD_CLK: P2.30 U1.26 | length 1266.5
  Top Layer w9.84: P2.30 4169.84,5757.48 v1(4169.84,5939.84) ; U1.26 4787.97,6521.71 v1(4804.84,6504.84)
  Bottom Layer w9.84: v1(4169.84,5939.84) 4169.84,6139.84 4374.84,6344.84 4629.84,6344.84 4789.84,6504.84 v1(4804.84,6504.84)
LCD_D2: P2.23 U1.6 | length 793.1
  Top Layer w9.84: P2.23@4305.54,5755.34 4305.54,5840.54 4334.84,5869.84 v1(4334.84,5929.84) ; v1(4379.84,6309.84) 4438.24,6368.24 U1.6
  Bottom Layer w9.84: v1(4334.84,5929.84) 4334.84,6059.84 4434.84,6159.84 4434.84,6254.84 v1(4379.84,6309.84)
LCD_D3: P2.24 U1.7 | length 791.2
  Top Layer w9.84: P2.24 4285.88,5850.88 4304.84,5869.84 v1(4304.84,5954.84) ; v1(4379.84,6274.84) 4453.99,6348.99 U1.7
  Bottom Layer w9.84: v1(4304.84,5954.84) 4304.84,6064.84 4414.84,6174.84 4414.84,6239.84 v1(4379.84,6274.84)
LCD_D4: P2.25 U1.8 | length 797.6
  Top Layer w9.84: P2.25 4266.2,5851.2 4274.84,5859.84 v1(4274.84,5929.84) ; v1(4369.84,6234.84) 4469.74,6334.74 U1.8
  Bottom Layer w9.84: v1(4274.84,5929.84) 4274.84,6064.84 4394.84,6184.84 4394.84,6209.84 v1(4369.84,6234.84)
LCD_D5: P2.26 U1.9 | length 791.5
  Top Layer w9.84: P2.26 4246.49,5886.49 v1(4249.84,5889.84) ; v1(4359.84,6194.84) 4485.49,6320.49 U1.9
  Bottom Layer w9.84: v1(4249.84,5889.84) 4249.84,6084.84 v1(4359.84,6194.84)
LCD_D6: P2.27 U1.10 | length 813.2
  Top Layer w9.84: P2.27 4226.84,6031.84 4339.84,6144.84 ; U1.10 4501.24,6306.24 4344.84,6149.84 ; 4339.84,6144.84 4344.84,6149.84 ; 4339.84,6144.84 4344.84,6149.84
LCD_D7: P2.28 U1.11 | length 880.9
  Top Layer w9.84: v1(4194.84,5834.84) 4207.14,5822.54 P2.28 ; v1(4469.84,6234.84) 4516.99,6281.99 U1.11
  Bottom Layer w9.84: v1(4194.84,5834.84) 4219.84,5834.84 4244.84,5859.84 4304.84,5859.84 4369.84,5924.84 4369.84,5964.84 4369.84,6049.84 4469.84,6149.84 v1(4469.84,6234.84)
LCD_D10: P2.15 U1.12 | length 722.4
  Top Layer w9.84: P2.15@4463.24,5755.24 4463.24,5858.24 4494.84,5889.84 4494.84,6149.84 4509.84,6164.84 4532.74,6184.84 U1.12
LCD_D11: P2.16 U1.13 | length 826.8
  Top Layer w9.84: P2.16 4443.46,5888.46 4459.84,5904.84 v1(4469.84,5904.84) ; U1.13 4549.84,6446.56 v1(4549.84,6144.84)
  Bottom Layer w9.84: v1(4469.84,5904.84) 4509.84,5904.84 4604.84,5999.84 4604.84,6114.84 4574.84,6144.84 v1(4549.84,6144.84)
LCD_D12: P2.17 U1.14 | length 934.4
  Top Layer w9.84: P2.17 4423.76,5873.06 ; 4423.76,5787.11 4423.76,5908.76 v1(4459.84,5944.84) ; v1(4549.84,6109.84) 4564.84,6109.84 4574.84,6119.84 4574.84,6179.84 4564.18,6190.5 U1.14
  Bottom Layer w9.84: v1(4459.84,5944.84) 4469.84,5954.84 4519.84,5954.84 4589.84,6024.84 4589.84,6099.84 4579.84,6109.84 v1(4549.84,6109.84)
LCD_D13: P2.18 U1.15 | length 881.5
  Top Layer w9.84: P2.18 4404.09,5827.91 ; 4404.09,5800.61 4404.09,5934.09 v1(4449.84,5979.84) ; v1(4549.84,6074.84) 4559.84,6074.84 4589.84,6104.84 4589.84,6194.84 4579.99,6204.69 U1.15
  Bottom Layer w9.84: v1(4449.84,5979.84) 4444.84,5979.84 4524.84,5979.84 4574.84,6029.84 4574.84,6049.84 v1(4549.84,6074.84)
LCD_D14: P2.19 U1.16 | length 844.6
  Top Layer w9.84: P2.19 4384.41,5954.41 v1(4444.84,6014.84) ; v1(4549.84,6039.84) 4604.84,6094.84 4604.84,6199.84 4595.69,6208.99 U1.16
  Bottom Layer w9.84: v1(4444.84,6014.84) 4439.84,6014.84 4524.84,6014.84 v1(4549.84,6039.84)
LCD_D15: P2.20 U1.17 | length 879.6
  Top Layer w9.84: v1(4349.84,5824.84) 4364.64,5810.04 P2.20 ; U1.17 4611.49,6258.19 4624.84,6244.84 v1(4624.84,6224.84)
  Bottom Layer w9.84: v1(4349.84,5824.84) 4454.84,5824.84 4624.84,5994.84 v1(4624.84,6224.84)
LCD_D18: P2.7 U1.18 | length 722.5
  Top Layer w9.84: P2.7 4620.64,5925.64 4659.84,5964.84 4659.84,6244.84 4627.14,6277.44 U1.18@4627.14,6447.94
LCD_D19: P2.8 U1.19 | length 745.7
  Top Layer w9.84: v1(4589.84,5874.84) 4600.92,5863.76 P2.8 ; U1.19 4642.99,6306.69 v1(4674.84,6274.84)
  Bottom Layer w9.84: v1(4589.84,5874.84) 4589.84,5919.84 4644.84,5974.84 4644.84,6199.84 4649.84,6204.84 4649.84,6249.84 v1(4674.84,6274.84)
LCD_D20: P2.9 U1.21 | length 912
  Top Layer w9.84: P2.9 4579.84,5694.84 4587.63,5684.84 v1(4604.84,5684.84) ; U1.21 4674.44,6320.24 v1(4699.84,6294.84)
  Bottom Layer w9.84: v1(4604.84,5684.84) 4619.84,5684.84 4629.84,5694.84 4629.84,5899.84 4674.84,5944.84 4674.84,6234.84 4699.84,6259.84 v1(4699.84,6294.84)
LCD_D21: P2.10 U1.23 | length 1068.3
  Top Layer w9.84: P2.10@4561.55,5755.24 4559.84,5753.53 4559.84,5694.84 4559.84,5664.84 v1(4579.84,5644.84) ; U1.23 4749.84,6441.46 v1(4749.84,6399.84)
  Bottom Layer w9.84: v1(4579.84,5644.84) 4639.84,5644.84 4649.84,5654.84 4649.84,5894.84 4699.84,5944.84 4699.84,6229.84 4724.84,6254.84 4724.84,6374.84 v1(4749.84,6399.84)
LCD_D22: P2.11 U1.24 | length 1245.3
  Top Layer w9.84: v1(4524.84,5654.84) 4541.86,5671.86 P2.11 ; U1.24@4716.74,6490.24 4749.44,6490.24 4784.84,6454.84 v1(4784.84,6434.84)
  Bottom Layer w9.84: v1(4524.84,5654.84) 4524.84,5629.84 4539.84,5614.84 4654.84,5614.84 4669.84,5629.84 4669.84,5874.84 4719.84,5924.84 4719.84,6214.84 4744.84,6239.84 4744.84,6339.84 4784.84,6379.84 v1(4784.84,6434.84)
LCD_D23: P2.12 U1.25 | length 1382.6
  Top Layer w9.84: v1(4484.84,5654.84) 4484.84,5659.84 4522.18,5697.18 P2.12 ; U1.25 4768.67,6506.01 4804.84,6469.84 v1(4809.84,6469.84)
  Bottom Layer w9.84: v1(4484.84,5654.84) 4484.84,5629.84 4524.84,5589.84 4659.84,5589.84 4689.84,5619.84 4689.84,5849.84 4739.84,5899.84 4739.84,6194.84 4764.84,6219.84 4764.84,6329.84 4809.84,6374.84 v1(4809.84,6469.84)
LCD_DE: P2.34 U1.27 | length 1411.4
  Top Layer w9.84: v1(4079.84,5894.84) 4089.03,5885.65 P2.34 ; U1.27 4827.17,6537.51 v1(4834.84,6529.84)
  Bottom Layer w9.84: v1(4079.84,5894.84) 4109.84,5894.84 4144.84,5929.84 4144.84,6149.84 4359.84,6364.84 4609.84,6364.84 4774.84,6529.84 v1(4834.84,6529.84)
LCD_HSYNC: P2.32 U1.28 | length 1209.9
  Top Layer w9.84: P2.32 4129.84,5756.79 4129.84,5909.84 v1(4129.84,6249.84) ; v1(4669.84,6554.84) 4693.24,6554.84 4693.24,6553.24 U1.28@4716.74,6553.24
  Bottom Layer w9.84: v1(4129.84,6249.84) 4134.84,6249.84 4294.84,6409.84 4524.84,6409.84 v1(4669.84,6554.84)
LCD_VSYNC: P2.33 U1.29 | length 1380.4
  Top Layer w9.84: v1(4104.84,5939.84) 4109.84,5934.84 4109.84,5889.84 4109.84,5756.49 P2.33 ; U1.29@4716.74,6568.94 4795.74,6568.94 4799.84,6564.84 v1(4809.84,6564.84)
  Bottom Layer w9.84: v1(4104.84,5939.84) 4104.84,6169.84 4319.84,6384.84 4574.84,6384.84 4679.84,6489.84 4699.84,6489.84 4759.84,6549.84 4794.84,6549.84 v1(4809.84,6564.84)
M_DM-: SW6.3 USB5.2 | length 816
  Top Layer w9.84: USB5.2 3633.94,6728.94 3669.84,6764.84 3669.84,6974.84 3619.84,7024.84 v1(3619.84,7044.84)
  Bottom Layer w11.81: v1(3619.84,7044.84) 3799.84,7044.84 3844.84,7089.84 3844.84,7204.84 SW6.3@3788.24,7261.74
M_DP+: SW6.6 USB5.3 | length 622.7
  Top Layer w9.84: USB5.3@3608.34,6649.84 3694.84,6736.84 3694.84,6999.84 3659.84,7034.84 v1(3659.84,7069.84)
  Bottom Layer w11.81: v1(3659.84,7069.84) 3730.19,7069.84 SW6.6
PWM_LED: R1.1 U1.43 | length 752
  Top Layer w9.84: U1.43@4716.74,6789.44 4825.24,6789.44 4859.84,6754.84 4859.84,6374.84 4740.14,6255.14 R1.1@4740.14,6209.84
R20_2: R20.2 R21.1 SW2.1 | length 636.2
  Top Layer w9.84: R21.1 5029.5,6610.52 R20.2 5029.5,6380.18 5109.84,6299.84 5150.46,6299.84 SW2.1
R21_2: R21.2 R22.1 SW3.1 | length 366.5
  Top Layer w9.84: R22.1@4970.14,6729.84 R21.2 ; R21.2 5160.39,6669.84 SW3.1
R22_2: R22.2 R23.1 SW4.1 | length 536.3
  Top Layer w9.84: R23.1@4970.14,6789.84 R22.2 ; R22.2 5059.84,6729.84 5079.84,6749.84 5079.84,6944.84 5094.84,6959.84 5250.32,6959.84 SW4.1
R23_2: R23.2 SW5.1 | length 745.8
  Top Layer w9.84: R23.2 5059.84,6824.84 5059.84,7289.84 5114.84,7344.84 5245.24,7344.84 SW5.1@5263.84,7326.24
R32_1: LED1.2 R32.1 | length 90.5
  Top Layer w9.84: LED1.2 4188.36,7803.71 R32.1
RESET: C6.1 R6.2 SW7.1 U1.70 | length 683.3
  Top Layer w9.84: SW7.1 3868.88,6654.5 R6.2 4024.84,6717.28 C6.1 ; C6.1@4029.84,6722.24 4067.24,6722.24 4104.84,6759.84 4331.04,6759.84 U1.70@4332.94,6757.94
S$20955: 
S$21295: 
S$21300: 
S$21317: 
S$21319: 
S$21331: 
S$21333: 
S$21335: 
S$21339: 
S$21341: 
S$21343: 
S$21347: 
S$21349: 
S$21352: 
S$21356: 
S$21360: 
S$25040: 
S_DM-: SW6.1 USB3.2 | length 310.8
  Top Layer w11.81: USB3.2 3285.75,7261.77 SW6.1
S_DP+: SW6.4 USB3.3 | length 361.8
  Top Layer w11.81: USB3.3 3489.84,7239.84 3591.42,7138.27 SW6.4
SDC0_CLK: CARD2.5 U1.56 | length 633
  Top Layer w9.84: U1.56 4516.99,7076.99 4534.84,7094.84 4534.84,7264.84 v1(4519.84,7279.84)
  Bottom Layer w9.84: CARD2.5 4504.84,7438.43 4504.84,7354.84 4519.84,7339.84 v1(4519.84,7279.84)
SDC0_CMD: CARD2.3 R29.2 U1.55 | length 690
  Top Layer w9.84: U1.55 4532.74,7042.74 v1(4614.84,7124.84)
  Bottom Layer w9.84: CARD2.3 4586.81,7372.87 4654.84,7304.84 R29.2 4614.84,7189.5 v1(4614.84,7124.84)
SDC0_D0: CARD2.7 R30.2 U1.57 | length 680.7
  Top Layer w9.84: v1(4449.84,7124.84) 4501.24,7073.44 U1.57
  Bottom Layer w9.84: CARD2.7 4413.58,7381.1 4489.85,7304.83 4489.85,7229.5 4449.84,7189.49 v1(4449.84,7124.84)
SDC0_D1: CARD2.8 R31.2 U1.58 | length 700.4
  Top Layer w9.84: v1(4359.84,7124.84) 4485.44,6999.24 U1.58@4485.44,6831.84
  Bottom Layer w9.84: v1(4359.84,7124.84) 4359.84,7179.5 R31.2 4409.84,7324.84 4370.28,7364.4 CARD2.8
SDC0_D2: CARD2.1 R27.2 U1.53 | length 800.7
  Top Layer w9.84: U1.53 4564.18,6949.18 4739.84,7124.84 v1(4779.84,7124.84)
  Bottom Layer w9.84: CARD2.1 4819.2,7297.3 R27.2 4779.84,7190.14 v1(4779.84,7124.84)
SDC0_D3: CARD2.2 R28.2 U1.54 | length 733.6
  Top Layer w9.84: U1.54 4548.49,6978.49 v1(4694.84,7124.84)
  Bottom Layer w9.84: CARD2.2 4630.12,7404.56 4737.02,7297.66 R28.2 4694.84,7187.32 v1(4694.84,7124.84)
SPI0_CLK: U1.59 U4.6 | length 414.6
  Top Layer w9.84: U4.6 4394.84,7019.84 4469.74,6944.94 U1.59
SPI0_CS: R26.2 U1.60 U4.1 | length 852.9
  Top Layer w9.84: U4.1@3920.34,7119.84 4014.84,7119.84 4139.84,6994.84 4379.84,6994.84 4454.04,6920.64 U1.60 ; U4.1 3920.38,7140.38 3974.84,7194.84 R26.2
SPI0_MISO: U1.61 U4.2 | length 648.5
  Top Layer w9.84: U4.2@3920.34,7069.84 3994.84,7069.84 4134.84,6929.84 4394.84,6929.84 4438.24,6886.44 U1.61
SPI0_MOSI: U1.62 U4.5 | length 295.2
  Top Layer w9.84: U4.5 4204.3,6964.84 v1(4279.84,6964.84) ; v1(4349.84,6899.84) 4379.84,6899.84 4422.49,6857.19 U1.62
  Bottom Layer w9.84: v1(4279.84,6964.84) 4344.84,6899.84 v1(4349.84,6899.84)
SVREF: C7.2 C8.1 R7.2 R8.1 U1.33 | length 395.2
  Top Layer w9.84: U1.33 4766.96,6631.96 4814.84,6679.84 v1(4814.84,6714.84)
  Bottom Layer w9.84: R7.2 4814.84,6714.5 v1(4814.84,6714.84) ; C7.2 C8.1
TPX1: P2.37 U3.2 | length 383.6
  Top Layer w9.84: v1(3809.84,5839.84) 3820.16,5850.16 U3.2 ; v1(4029.84,5819.84) P2.37
  Bottom Layer w9.84: v1(3809.84,5839.84) 3829.84,5859.84 3994.84,5859.84 4029.84,5824.84 v1(4029.84,5819.84)
TPX2: P2.39 U3.4 | length 325.5
  Top Layer w9.84: U3.4@3859.54,5906.74 3859.84,5854.84 3869.84,5844.84 v1(3869.84,5794.84) ; v1(3969.84,5809.84) 3990.67,5789.01 P2.39
  Bottom Layer w9.84: v1(3869.84,5794.84) 3869.84,5824.84 3874.84,5829.84 3959.84,5829.84 3969.84,5819.84 v1(3969.84,5809.84)
TPY1: P2.38 U3.3 | length 339.5
  Top Layer w9.84: v1(3839.84,5819.84) U3.3 ; v1(3994.84,5824.84) 4010.34,5809.34 P2.38@4010.34,5755.24
  Bottom Layer w9.84: v1(3839.84,5819.84) 3864.84,5844.84 3979.84,5844.84 3994.84,5829.84 v1(3994.84,5824.84)
TPY2: P2.40 U3.5 | length 213.6
  Top Layer w9.84: U3.5@3879.24,5906.74 3879.84,5864.84 3904.84,5839.84 v1(3904.84,5779.84) 3929.44,5755.24 P2.40
TW_IO: U1.46 U3.7 | length 1461.5
  Top Layer w9.84: U3.7 3859.53,6099.53 3899.84,6139.84 v1(3924.84,6139.84) ; U1.46 4674.44,6884.44 v1(4694.84,6904.84)
  Bottom Layer w9.84: v1(3924.84,6139.84) 3924.84,6254.84 3979.84,6309.84 3979.84,6464.84 4334.84,6819.84 4654.84,6819.84 4674.84,6839.84 4674.84,6884.84 v1(4694.84,6904.84)
U1_81: C27.2 U1.81 | length 197.1
  Top Layer w9.84: C27.2 4237.44,6689.84 4254.84,6689.84 4269.84,6674.84 4269.84,6599.84 4284.94,6584.74 U1.81
U1_83: C25.2 C26.1 R18.1 U1.83 | length 245.3
  Top Layer w9.84: C25.2 4229.5,6511.73 R18.1 ; C26.1 4249.02,6553.21 U1.83
U2_1: D1.2 L1.2 U2.1 | length 394.8
  Top Layer w9.84: D1.2 4974.84,5971.77 4974.84,5999.84 4994.96,6019.96 U2.1 4972.24,6022.44 4959.84,6034.84 4959.84,6184.84 4989.84,6214.84 L1.2@5040.75,6214.84
U2_4: R1.2 R3.2 U2.4 | length 164.1
  Top Layer w9.84: R1.2 R3.2 4824.5,6129.84 4844.84,6129.84 4877.44,6097.24 U2.4
U5_10: C32.2 U5.10 | length 105.8
  Top Layer w9.84: C32.2 3646.14,7594.84 U5.10
U13_2: C11.2 R11.1 R12.1 U13.2 | length 582.3
  Top Layer w9.84: R12.1 4169.5,7344.84 C11.2 4250.18,7342.74 R11.1 ; C11.2@4252.24,7344.84 4309.84,7402.44 4309.84,7474.84 4344.84,7509.84 4344.84,7544.84 4409.84,7609.84 4409.84,7614.84 4409.84,7649.04 U13.2@4378.94,7649.04
U13_3: C13.2 R10.2 R13.2 U13.3 | length 310.1
  Top Layer w9.84: U13.3 4414.84,7664.83 4507.28,7572.39 C13.2 4505.18,7562.74 R13.2 R10.2
U13_6: L3.2 U13.6 | length 158.1
  Top Layer w11.81: U13.6 4351.34,7736.34 4364.84,7749.84 4399.84,7749.84 4429.84,7719.84 L3.2
U13_11: L4.1 U13.11 | length 128.1
  Top Layer w9.84: L4.1@4145.75,7664.84 4177.24,7696.33 U13.11
U13_14: C15.1 R9.2 R14.2 U13.14 | length 328.8
  Top Layer w9.84: R9.2 R14.2
  Top Layer w11.81: C15.1 4169.84,7539.84 4214.84,7584.84 4214.84,7634.84 4229.08,7649.08 U13.14
  Top Layer w23.62: C15.1 4144.5,7537.74 R14.2
U13_20: L2.2 U13.20 | length 196.5
  Top Layer w9.84: L2.2 4279.84,7474.84 4324.84,7519.84 4324.84,7549.84 4351.33,7576.33 U13.20
U22_1: CN1.2 U22.1 | length 265.1
  Top Layer w9.84: CN1.2 3164.84,5944.84 3339.84,5944.84 3354.84,5929.84 U22.1
U22_3: CN1.1 U22.3 | length 424.1
  Top Layer w9.84: CN1.1 3239.84,5969.84 3444.84,5969.84 3454.84,5959.84 U22.3
U22_6: L5.2 U22.6 | length 270
  Top Layer w9.84: U22.6 3604.84,5824.84 3629.84,5799.84 3665.75,5799.84 L5.2@3765.75,5699.84
U22_7: C22.1 U22.7 | length 602.3
  Top Layer w9.84: U22.7 3654.84,5834.84 3664.84,5824.84 3674.84,5824.84 3729.84,5824.84 3744.84,5839.84 3744.84,5984.84 3764.84,6004.84 3764.84,6187.24 C22.1@3694.84,6257.24
U22_8: C24.1 U22.8 | length 459.5
  Top Layer w9.84: C24.1 3629.84,6252.28 3629.84,6224.84 3674.84,6179.84 3719.84,6179.84 3734.84,6164.84 3734.84,6034.84 3704.84,6004.84 U22.8
U22_10: C23.2 U22.10 | length 202.7
  Top Layer w9.84: C23.2 3654.84,6152.07 U22.10
U22_12: R17.1 U22.12 | length 186.1
  Top Layer w9.84: R17.1 3554.84,6184.97 U22.12
U22_14: CN2.2 U22.14 | length 420.8
  Top Layer w9.84: CN2.2 3164.84,6279.84 3249.84,6194.84 3434.84,6194.84 3454.84,6174.84 U22.14
U22_16: CN2.1 U22.16 | length 270.6
  Top Layer w9.84: CN2.1 3154.84,6174.84 3334.84,6174.84 3354.84,6154.84 U22.16
UART0_RX: U1.49 U5.8 | length 2005
  Top Layer w9.84: v1(3464.84,7669.84) 3594.84,7669.84 3614.84,7649.84 U5.8 ; v1(4619.84,6874.84) 4627.19,6867.49 U1.49
  Bottom Layer w9.84: v1(3464.84,7669.84) 3419.84,7669.84 3404.84,7654.84 3404.84,7584.84 3429.84,7559.84 3814.84,7559.84 3914.84,7459.84 3914.84,7274.84 3939.84,7249.84 4174.84,7249.84 4454.84,6969.84 4524.84,6969.84 v1(4619.84,6874.84)
UART0_TX: U1.48 U5.9 | length 1928.9
  Top Layer w9.84: v1(3434.84,7639.84) 3584.84,7639.84 3594.52,7630.16 U5.9 ; v1(4634.84,6899.84) 4642.99,6891.69 U1.48
  Bottom Layer w9.84: v1(3434.84,7639.84) 3434.84,7594.84 3449.84,7579.84 3824.84,7579.84 3934.84,7469.84 3934.84,7309.84 3969.84,7274.84 4179.84,7274.84 4469.84,6984.84 4549.84,6984.84 v1(4634.84,6899.84)
USB3_4: R15.2 R16.1 USB3.4 | length 203.6
  Top Layer w9.84: USB3.4 3355.78,7214.25 R16.1 R15.2
USB_DM-: SW6.2 U1.68 | length 939.5
  Top Layer w9.84: SW6.2 3689.84,7219.84 3739.84,7169.84 3739.84,7039.84 3869.84,6909.84 4054.84,6909.84 4175.24,6789.44 U1.68@4332.94,6789.44
USB_DM_SERIAL-: U5.2 USB1.2 | length 285.3
  Top Layer w9.84: USB1.2@3769.94,7863.24 3769.94,7639.74 3780.14,7630.14 U5.2@3827.94,7630.14
USB_DP+: SW6.5 U1.69 | length 829.7
  Top Layer w9.84: 3804.84,6944.84 3859.84,6889.84 4044.84,6889.84 4160.94,6773.74 U1.69
  Top Layer w11.81: SW6.5 3694.84,7122.91 3694.84,7054.84 3804.84,6944.84
USB_DP_SERIAL+: U5.1 USB1.3 | length 318.9
  Top Layer w9.84: USB1.3@3744.34,7863.24 3744.34,7640.34 3774.24,7610.44 U5.1@3827.94,7610.44
USB_ID: R15.1 U1.47 | length 1505.3
  Top Layer w9.84: R15.1 v1(3529.84,7104.84) ; U1.47 4658.69,6913.69 v1(4669.84,6924.84)
  Bottom Layer w9.84: v1(3529.84,7104.84) 3529.84,7064.84 3579.84,7014.84 4364.84,7014.84 4429.84,6949.84 4494.84,6949.84 4599.84,6844.84 4654.84,6844.84 4659.84,6849.84 4659.84,6914.84 v1(4669.84,6924.84)
VBUS: R16.2 SW1.3 SW1.6 USB1.1 USB3.1 USB5.1 | length 1729.4
  Top Layer w9.84: USB3.1 3351.02,7291.02 v1(3384.84,7324.84) ; v1(3389.84,7214.84) 3414.51,7214.84 R16.2
  Top Layer w15.75: USB1.1@3795.54,7863.24 3794.84,7789.84 v1(3804.84,7779.84)
  Mid-Layer 1 w39.37: USB5.1 3432.34,6827.34 3389.84,6869.84 3379.84,7319.84 v1(3384.84,7324.84) 3407.91,7347.91 SW1.3 SW1.6 3591.42,7566.42 v1(3804.84,7779.84)
VCC: C5.2 C15.2 C16.2 C17.1 CARD2.4 L4.2 P2.4 P2.31 R4.2 R5.2 R6.1 R14.1 R26.1 R27.1 R28.1 R29.1 R30.1 R31.1 R32.2 U1.4 U1.5 U1.20 U1.50 U1.67 U1.73 U3.1 U4.3 U4.7 U4.8 U5.7 U17.3 | length 9444.6
  Top Layer w9.84: C17.1 3584.84,7714.84 3630.15,7669.53 U5.7 3719.84,7669.54 3719.84,7629.84 3764.84,7584.84 3919.84,7584.84 3993.94,7658.94 L4.2 ; U4.3 3974.84,7019.84 v1(4009.84,6984.84) ; R26.1 4159.84,7194.84 4199.3,7155.38 U4.8 U4.7 v1(4114.84,7069.84) ; v1(4089.84,6624.84) 4089.84,6694.84 4133.64,6738.54 4169.84,6738.54 ; 4169.84,6738.59 4276.09,6738.59 4303.97,6710.71 U1.73 4375.71,6710.71 4429.84,6764.84 4579.84,6764.84 4611.49,6796.49 U1.50 ; v1@4169.84,6856.14 4178.54,6856.14 4229.44,6805.24 U1.67 ; 4393.84,6381.94 4416.94,6381.94 4422.54,6387.54 U1.5 ; U1.5 4422.49,6472.49 4429.84,6479.84 4654.84,6479.84 4658.69,6475.99 U1.20
  Top Layer w11.81: U3.1 v1(3800.47,5994.21) 3779.84,6014.84 3779.84,6144.5 R5.2 R4.2 ; v1(4084.84,5689.84) 4103.08,5671.6 4148.08,5671.6 ; v1(4139.84,6294.84) 4306.74,6294.84 4406.74,6394.84 U1.4 ; P2.31 4148.08,5671.6 ; P2.4 4679.66,5684.66 4614.84,5619.84 4199.84,5619.84 4148.08,5671.6
  Top Layer w15.75: U4.8 4244.84,7119.84 4284.84,7159.84 4369.84,7159.84 v1(4434.84,7094.84)
  Top Layer w19.68: L4.2 3993.93,7531.49 C16.2 4069.84,7522.4 C15.2 4087.28,7471.94 R14.1 4049.84,7469.84 4033.2,7453.2 U17.3 ; v1@3999.84,7329.84 v1(3999.84,7331.48) U17.3 ; R6.1 4060.18,6595.18 v1(4089.84,6624.84) ; R26.1 4084.5,7225.18 4033.2,7276.48 U17.3
  Top Layer w39.37: v1(4044.84,7789.84) 3993.93,7738.93 L4.2 3993.94,7823.94 4034.84,7864.84 R32.2@4190.14,7864.84
  Mid-Layer 1 w9.84: v1(4009.84,6984.84) 4029.84,6984.84 v1(4114.84,7069.84)
  Mid-Layer 1 w11.81: v1(3800.47,5994.21) 3806.1,5999.84 3914.84,5999.84 3982.42,6067.41 4024.84,6067.41 ; 4088.13,6328.13 4121.42,6294.84 v1(4139.84,6294.84)
  Mid-Layer 1 w19.68: v1(4089.84,6624.84) 4089.84,6709.72 4169.84,6789.72
  Mid-Layer 1 w39.37: v1(4044.84,7789.84) 3999.84,7744.84 v1(3999.84,7331.48) 4169.84,7161.48 v1(4169.84,6856.17) 4169.84,6789.72 4169.84,6738.59 4169.84,6409.84 4024.84,6264.84 v1(4024.84,5949.84) 4024.84,5879.84 4084.84,5819.84 v1(4084.84,5689.84)
  Bottom Layer w9.84: R31.1 4409.84,7124.84 4434.84,7099.84 v1(4434.84,7094.84) 4584.84,7094.84 ; R30.1 4499.84,7160.18 4499.84,7114.84 4499.84,7094.84 4501.54,7094.84 ; CARD2.4 4543.5,7366.18 4614.84,7294.84 4614.84,7219.84 4570.72,7175.72 C5.2 4559.84,7160.6 4559.84,7119.84 4584.84,7094.84 ; R29.1 4654.84,7119.84 4654.84,7109.84 4639.84,7094.84 ; R28.1 4737.02,7117.02 4714.84,7094.84 ; R27.1 4819.2,7119.2 4794.84,7094.84 4714.84,7094.84 ; 4584.84,7094.84 4639.84,7094.84 ; 4639.84,7094.84 4714.84,7094.84
VLED+: C3.2 C4.2 D1.1 P2.2 U2.5 | length 498.3
  Top Layer w9.84: P2.2 4719.03,5799.03 4734.84,5814.84 4759.84,5814.84 4779.84,5834.84 4779.84,5862.28 C4.2 C3.2 4862.91,5949.84 D1.1 4924.84,5981.77 4924.84,6034.84 4899.84,6059.84 U2.5
VLED-: P2.1 R2.2 U2.3 | length 713.4
  Top Layer w9.84: P2.1 4739.84,5756.38 4739.84,5789.84 4749.84,5799.84 4814.84,5799.84 4884.84,5869.84 5029.84,5869.84 5104.84,5944.84 5104.84,6074.84 5085.18,6094.5 R2.2 5057.1,6097.24 U2.3
pads on no net: CARD2. CARD2.9 P2.35 SW1.1 SW1.4 SW2.3 SW2.4 SW3.3 SW3.4 SW4.3 SW4.4 SW5.3 SW5.4 SW7.2 SW7.4 U1.2 U1.3 U1.39 U1.40 U1.41 U1.42 U1.44 U1.45 U1.63 U1.64 U1.65 U1.66 U1.72 U1.75 U1.76 U1.77 U1.78 U1.84 U1.85 U1.86 U1.87 U5.4 U5.5 U5.6 USB1.4 USB5.0

## Polygon pours and split planes (outlines as drawn)
GND on Mid-Layer 2 "Mid-Layer 2-GND" (solid, pour order 0): 3094.84,8044.84 3094.84,5514.84 5359.84,5514.84 5359.84,8044.84 3094.84,8044.84

## Keep-outs
Keep-Out Layer:
  lines w5.98: 3094.85,5595.48 ccw(c3174.84,5594.84) 3176.32,5514.86 ; 3094.86,7963.36 cw(c3174.84,7964.84) 3175.48,8044.84 ; 5278.47,8044.83 cw(c5279.95,7964.84) 5359.94,7964.21 ; 5279.21,5514.85 ccw(c5279.84,5594.84) 5359.83,5596.32

## Other copper
Bottom Layer:
  text "+" at 4925.92,7558.76 h39.37 r225

## Silkscreen, mask and mechanical layers (free items; w line width, h text height)
Top Overlay:
  text "R+" at 3200.16,6304.84 h39.37 r270
  text "R-" at 3200.16,6204.84 h39.37 r270
  text "L-" at 3196.12,6090.93 h39.37 r252
  text "L+" at 3195.16,5989.84 h39.37 r270
Bottom Overlay:
  lines w6: 4220.26,6349.84 3819.84,6349.84 ccw(c3819.84,5957.85) 3819.84,5565.87 4219.84,5565.87 ccw(c4220.05,5959.57) 4220.26,6353.27